# Altium PCB RF_PCB.PcbDoc (part 2 of 2)
Units mm, origin at the board's own origin, x right, y up, seen from the top; angles counter-clockwise.
Board outline 136.5 x 91.58 mm, 2 copper layers (Top Layer, Bottom Layer); 69 components, 49 nets, 307 pads, 47 vias.
Unrouted connection lines stored in the file: 8.
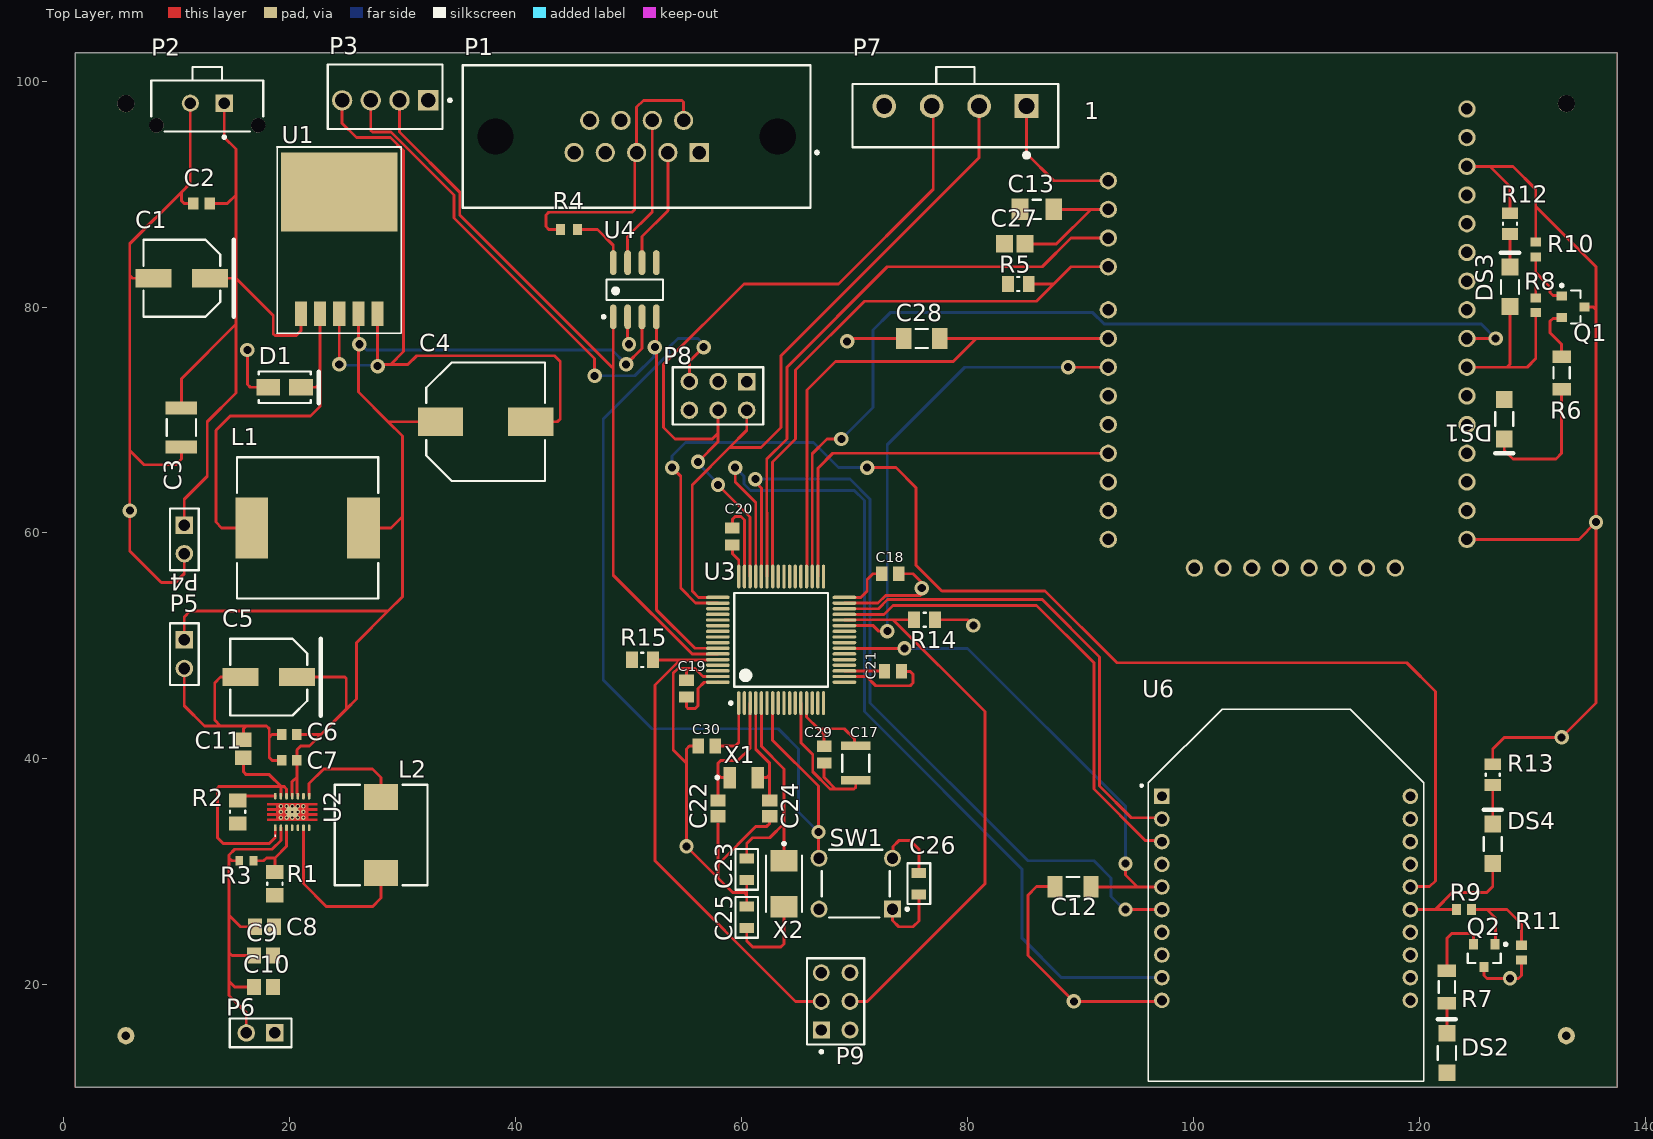
[diagram p0: Top Layer view]

## Via types
v1: diameter 1.27, hole 0.711, Top Layer to Bottom Layer, 32 vias
v2: diameter 0.4, hole 0.2, Top Layer to Bottom Layer, 15 vias

## Nets (pads, with @x,y where several pads share a name; then routed paths per layer and width w, separated by ;. In a path a pad name is that pad's centre, name@x,y a point inside that pad or via, vN(x,y) a via of type N, cw(c..) or ccw(c..) an arc to the next point about the centre after c; other vN are vias at no path point) (continued)
Net1_4: 1.4 R5.1 U3.42 | length 52.8
  Top Layer w0.254: U3.42 62.75,61.67 62.738,61.682 62.738,66.294 64.77,68.326 64.77,74.422 70.866,80.518 86.106,80.518 87.63,82.042 ; R5.1 87.63,82.042 ; 1.4 89.154,83.566 87.63,82.042
Net1_6: 1.6 C28.2 U3.36 | length 48.3
  Top Layer w0.254: U3.36 65.75,57.058 65.786,57.094 65.786,72.644 68.326,75.184 78.74,75.184 80.772,77.216 ; C28.2 80.772,77.216 ; 1.6 80.772,77.216
Net1_7: 1.7 U3.27 | length 42.9
  Top Layer w0.254: U3.27 71.648,51.796 72.136,51.308 v1(72.898,51.308) ; v1(88.9,74.676) 1.7
  Bottom Layer w0.254: v1(72.898,51.308) 72.898,67.818 79.756,74.676 v1(88.9,74.676)
Net1_10: 1.10 U3.34 | length 35.8
  Top Layer w0.254: U3.34 66.75,65.734 68.072,67.056 1.10
Net1_28: 1.28 DS3.1 R8.1 | length 15.9
  Top Layer w0.254: 1.28 127.762,74.676 ; DS3.1 128.016,74.93 127.762,74.676 ; R8.1 130.302,75.438 129.54,74.676 127.762,74.676
Net1_29: 1.29 U3.35 | length 84
  Top Layer w0.254: U3.35 66.25,67.012 67.564,68.326 v1(68.834,68.326) ; 1.29 v1(126.746,77.216)
  Bottom Layer w0.254: v1(68.834,68.326) 71.628,71.12 71.628,77.978 73.152,79.502 91.089,79.502 92.105,78.486 125.476,78.486 v1(126.746,77.216)
NetC11_2: C11.2 U2.1 U2.12 U2.13 | length 23.6
  Top Layer w0.254: C11.2 15.9,38.862 16.154,38.608 18.186,38.608 19.218,37.576 ; U2.1 18.718,33.044 18.186,32.512 14.122,32.512 13.614,33.02 13.614,37.427 13.763,37.576 19.218,37.576 ; U2.13 19.218,37.576 ; U2.12 19.718,37.33 19.472,37.576 19.218,37.576
NetC12_2: C12.2 U3.23 U6.5 | length 44.5
  Top Layer w0.254: U3.23 69.106,49.79 74.416,49.79 v1(74.422,49.784) ; C12.2 90.97,28.664 94.996,28.664 ; v1(93.98,30.734) 93.98,29.718 94.996,28.702 94.996,28.664 ; U6.5 94.996,28.664
  Bottom Layer w0.254: v1(74.422,49.784) 80.01,49.784 93.98,35.814 v1(93.98,30.734)
NetC22_2: C22.2 U3.3 X1.1 | length 11.8
  Top Layer w0.254: C22.2 57.912,38.608 ; X1.1 58.166,38.354 57.912,38.608 ; U3.3 60.75,40.938 59.69,39.878 58.166,39.878 57.912,39.624 57.912,38.608
NetC23_2: C23.2 U3.4 X1.2 | length 10.3
  Top Layer w0.254: U3.4 61.25,40.858 62.484,39.624 62.484,38.608 ; X1.2 62.23,38.354 62.484,38.608 ; C23.2 62.484,38.608
NetC24_2: C24.2 U3.5 X2.1 | length 20.1
  Top Layer w0.254: C24.2 60.452,32.512 60.96,33.02 62.484,33.02 63.754,34.29 ; U3.5 61.75,41.12 63.754,39.116 63.754,34.29 ; X2.1 63.754,34.29
NetC25_2: C25.2 X2.2 | length 8
  Top Layer w0.254: C25.2 60.452,23.876 60.96,23.368 63.5,23.368 63.754,23.622 X2.2
NetC26_1: C26.1 SW1.3 | length 6
  Top Layer w0.254: SW1.3 73.406,31.258 73.406,32.258 73.914,32.766 74.93,32.766 75.692,32.004 C26.1
NetC26_2: C26.2 SW1.1 | length 6.1
  Top Layer w0.254: SW1.1 73.354,25.706 73.914,25.146 75.184,25.146 75.692,25.654 C26.2
NetD1_2: D1.2 L1.1 U1.2 | length 31.6
  Top Layer w0.254: L1.1 13.97,60.452 13.462,60.96 13.462,69.088 14.732,70.358 21.844,70.358 22.684,71.198 22.684,73.23 ; D1.2 22.352,72.898 22.684,73.23 ; U1.2 22.684,73.23
NetDS1_2: DS1.2 R6.2 | length 12.3
  Top Layer w0.254: DS1.2 127.508,67.31 128.27,66.548 132.08,66.548 132.588,67.056 R6.2
NetDS2_2: DS2.2 R7.2 | length 2.7
  Top Layer w0.254: DS2.2 R7.2
NetDS3_2: DS3.2 R12.2 | length 2.9
  Top Layer w0.254: DS3.2 R12.2
NetDS4_1: DS4.1 R9.1 U6.15 | length 12.1
  Top Layer w0.254: U6.15 121.399,26.657 ; R9.1 123.289,26.657 121.399,26.657 ; DS4.1 126.492,28.702 125.984,28.194 122.936,28.194 121.399,26.657
NetDS4_2: DS4.2 R13.2 | length 3.4
  Top Layer w0.254: DS4.2 R13.2
NetL2_1: L2.1 U2.6 | length 15.2
  Top Layer w0.254: U2.6 21.218,28.972 23.266,26.924 27.33,26.924 28.092,27.686 L2.1
NetL2_2: L2.2 U2.8 | length 10.1
  Top Layer w0.254: U2.8 21.718,37.822 23.012,39.116 27.33,39.116 28.092,38.354 L2.2
NetQ1_1: Q1.1 R8.2 R10.1 | length 7.1
  Top Layer w0.254: R8.2 130.302,83.058 ; R10.1 130.302,83.058 ; Q1.1 132.538,81.026 131.826,81.026 131.572,81.28 131.572,81.788 130.302,83.058
NetQ1_2: Q1.2 R6.1 | length 4.7
  Top Layer w0.254: R6.1 132.588,76.708 131.572,77.724 131.572,78.74 131.826,78.994 132.538,78.994 Q1.2
NetQ2_1: Q2.1 R9.2 R11.1 | length 10.3
  Top Layer w0.254: R9.2 125.984,26.67 ; Q2.1 126.746,23.656 126.746,25.908 125.984,26.67 ; R11.1 129.032,25.4 127.762,26.67 125.984,26.67
NetQ2_2: Q2.2 R7.1 | length 6.2
  Top Layer w0.254: R7.1 122.428,24.13 122.831,24.533 124.565,24.533 124.78,24.318 Q2.2
NetR1_1: R1.1 R3.2 U2.3 | length 6.4
  Top Layer w0.254: R3.2 17.678,30.988 17.932,31.242 18.694,31.242 ; R1.1 18.694,31.242 ; U2.3 19.718,32.266 18.694,31.242
NetR2_1: R2.1 U2.14 | length 3.5
  Top Layer w0.254: R2.1 15.767,36.706 U2.14
NetR4_2: R4.2 U4.8 | length 5.3
  Top Layer w0.254: R4.2 47.244,86.868 48.641,85.471 U4.8
NetU3_29: U3.29 U6.3 | length 43.6
  Top Layer w0.254: U3.29 72.608,52.796 73.406,53.594 86.106,53.594 91.186,48.514 91.186,37.338 95.758,32.766 97.117,32.766 U6.3
NetU3_30: U3.30 U6.2 | length 43.2
  Top Layer w0.254: U3.30 72.123,53.296 72.929,54.102 86.614,54.102 91.694,49.022 91.694,37.592 94.488,34.798 97.091,34.798 U6.2
NetU3_44: U3.44 U6.6 | length 72.1
  Top Layer w0.254: v1(61.214,64.77) 61.214,64.495 61.75,63.959 U3.44 ; v1(93.98,26.67) 93.986,26.664 97.199,26.664 U6.6
  Bottom Layer w0.254: v1(61.214,64.77) 69.596,64.77 71.374,62.992 71.374,44.958 85.344,30.988 91.186,30.988 92.71,29.464 92.71,27.835 93.875,26.67 v1(93.98,26.67)
NetU3_45: U3.45 U6.9 | length 81.8
  Top Layer w0.254: v1(59.436,65.786) 59.436,64.516 61.25,62.702 U3.45
  Bottom Layer w0.254: v1(59.436,65.786) 60.198,65.024 60.198,64.349 60.793,63.754 69.977,63.754 70.866,62.865 70.866,44.196 84.836,30.226 84.836,24.13 88.328,20.637 U6.9
NetU3_50: U3.50 U6.16 | length 116
  Top Layer w0.254: v1(53.848,65.786) 54.61,65.024 54.61,55.118 55.932,53.796 U3.50 ; v1(71.12,65.786) 73.66,65.786 75.438,64.008 75.438,57.15 77.724,54.864 86.868,54.864 93.218,48.514 118.872,48.514 121.412,45.974 121.412,29.21 120.904,28.702 119.24,28.702 U6.16
  Bottom Layer w0.254: v1(53.848,65.786) 53.848,66.802 55.046,68 66.366,68 68.58,65.786 v1@70.866,65.786
NRST: P8.5 SW1.4 U3.7 | length 82.6
  Top Layer w0.254: P8.5 55.372,75.184 v1(56.642,76.454) ; U3.7 62.75,42.851 62.738,42.839 62.738,41.656 66.802,37.592 v1(66.802,33.528) 66.802,31.258 SW1.4
  Bottom Layer w0.254: v1(56.642,76.454) 56.642,76.708 56.134,77.216 54.356,77.216 53.594,76.454 53.594,75.946 47.752,70.104 47.752,46.99 52.07,42.672 63.246,42.672 65.024,40.894 65.024,35.306 v1(66.802,33.528)
PB6: P3.3 U3.58 U4.4 | length 73.2
  Top Layer w0.254: P3.3 27.178,95.653 27.327,95.504 28.956,95.504 34.544,89.916 34.544,87.884 46.99,75.438 v1(46.99,73.914) ; U4.4 52.451,77.343 52.451,53.213 55.868,49.796 U3.58
  Bottom Layer w0.254: v1(46.99,73.914) 50.546,73.914 52.241,75.609 52.241,76.371 v1(52.324,76.454)
PB7: P3.2 U3.59 U4.1 | length 66.6
  Top Layer w0.254: P3.2 29.718,95.504 35.052,90.17 35.052,88.138 48.514,74.676 48.641,74.676 ; U4.1 48.641,74.676 ; U3.59 56.317,49.296 56.297,49.276 55.626,49.276 48.641,56.261 48.641,74.676
SWCLK: P7.2 P8.2 U3.49 | length 61.5
  Top Layer w0.254: U3.49 56.194,54.296 55.626,54.864 55.626,64.262 58.928,67.564 ; P8.2 60.452,69.088 58.928,67.564 ; P7.2 81.026,93.218 63.5,75.692 63.5,69.342 61.722,67.564 58.928,67.564
SWDIO: P7.3 P8.4 U3.46 | length 66.1
  Top Layer w0.254: v1(56.134,66.294) 57.912,68.072 57.912,68.834 ; v1(57.912,64.262) 60.75,61.424 U3.46 ; P8.4 57.912,68.834 ; P7.3 76.962,97.654 76.962,90.424 68.58,82.042 60.198,82.042 53.086,74.93 53.086,69.342 54.102,68.326 57.404,68.326 57.912,68.834
  Bottom Layer w0.254: v1(56.134,66.294) 56.134,66.167 57.912,64.389 v1(57.912,64.262)
V3.3: 1.27 C8.2 C9.2 C10.2 C13.2 C17.2 C18.2 C19.2 C20.2 C21.2 C27.2 C29.2 C30.2 DS1.1 DS2.1 P3.1 P6.1 P7.4 P8.1 P9.1 P9.2 R1.2 R2.2 R5.2 U2.4 U3.1 U3.13 U3.19 U3.32 U3.48 U3.64 U6.1 U6.14 | length 31.4
  Top Layer w0.254: C19.2 55.118,44.599 55.267,44.45 55.88,44.45 56.134,44.704 56.134,46.228 56.693,46.787 57.891,46.787 U3.64 ; C30.2 59.436,41.148 59.75,41.462 U3.1 ; C20.2 59.182,58.166 59.75,57.598 U3.48 ; U3.13 65.759,44.937 65.759,43.715 66.802,42.672 ; C29.2 67.31,42.164 66.802,42.672 ; U3.19 72.612,47.796 C21.2 ; U3.32 70.552,54.296 71.12,54.864 71.12,55.88 71.628,56.388 C18.2 ; C17.2 70.004,41.249 70.004,41.756 69.088,42.672 66.802,42.672
  Bottom Layer w0.254: P8.1 P8.1@60.5,73.454
pads on no net: 1.5 1.8 1.9 1.12 1.14 1.15 1.16 1.17 1.18 1.19 1.20 1.21 1.23 1.24 1.25 1.26 1.30 1.31 1.32 1.33 1.34 1.36 1.37 P1.1 P1.4 P1.5 P1.8 P1.9 P1.MH1 P1.MH2 P2.MH1 P2.MH2 P8.6 U1.6 U2.5 U2.7 U2.9 U2.15 U3.2 U3.6 U3.8 U3.9 U3.10 U3.11 U3.14 U3.15 U3.16 U3.17 U3.20 U3.21 U3.22 U3.24 U3.25 U3.26 U3.33 U3.37 U3.38 U3.39 U3.40 U3.41 U3.51 U3.52 U3.53 U3.54 U3.55 U3.56 U3.57 U3.61 U3.62 U4.5 U6.4 U6.7 U6.8 U6.11 U6.12 U6.13 U6.17 U6.18 U6.19 U6.20
copper on no net:
  other v2: 19.218,34.806 19.718,34.806 20.218,34.806 20.718,34.806 21.218,34.806 19.218,35.306 19.718,35.306 20.218,35.306 20.718,35.306 21.218,35.306 19.218,35.806 19.718,35.806 20.218,35.806 20.718,35.806 21.218,35.806

## Polygon pours and split planes (outlines as drawn)
V3.3 on Top Layer "NONET_L01_P000" (solid, shelved, pour order 0): 1,102.5 0.982,10.94 137.5,10.922 137.5,102.5
GND on Bottom Layer "NONET_L02_P001" (solid, shelved, pour order 1): 1,102.5 1,10.922 137.414,11.176 137.5,102.5